# EAGLE board CRYSTALATOR (EAGLE 6.3)
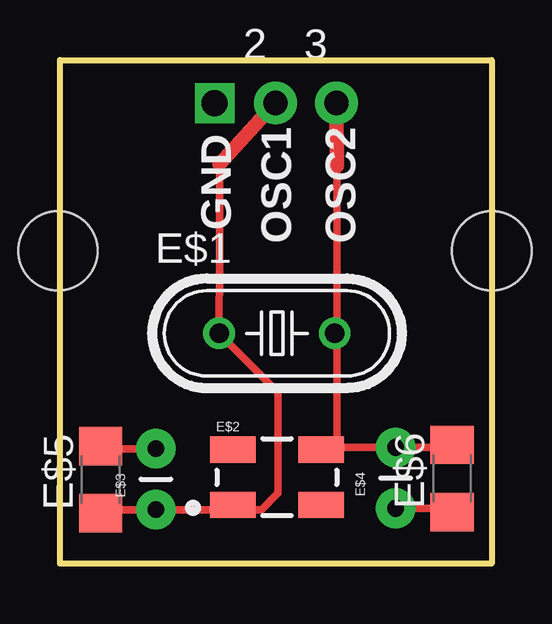
[diagram p0: board, top side]
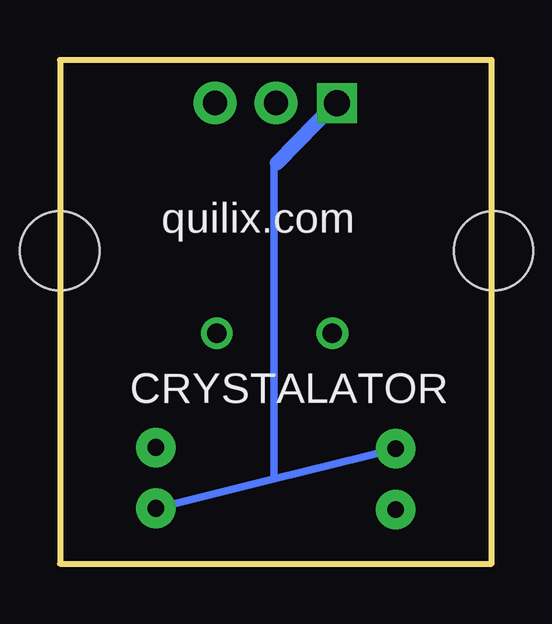
[diagram p1: board, bottom side, seen from below]

Size 18 x 21 mm. Coordinates in mm from the lower left corner, seen from the top.
Outline: 0,0 0,21 18,21 18,0 0,0
Copper layers (1*16): Top 0.035mm / dielectric 1.5mm / Bottom 0.035mm
Design rules "default": minimum track width 10mil, minimum drill 24mil, track to track 8mil, track to pad 8mil, pad to pad 8mil, via to via 8mil, smd to smd 8mil, copper to edge 40mil, drill to drill 8mil, minimum pad ring 10mil, minimum via ring 8mil, stop-mask expansion 4mil, vias tented up to drill 0mil, thermal gap 10mil

## Footprints (pad centres in the part's own frame; a part is rotated, then mirrored left to right if it is on the bottom)
1X01-CLEANBIG = drill 1.016 pad 1.778: 1 0,0
HC49U-V = drill 0.813: 1 -2.413,0; 2 2.413,0
CRYSTAL-OSC-SMD-5X3 = smd 1.9 x 1.1: 1 -1.85,-1.15; 2 1.85,-1.15; 3 1.85,1.15; 4 -1.85,1.15
CAP-PTH-SMALL = drill 0.7 pad 1.651: 1 0,0; 2 2.54,0
C1206 = smd 1.6 x 1.8: 1 -1.4,0; 2 1.4,0
STAND-OFF = hole 3.302: 0,0

## Placement (x,y rotation side)
2  [1X01-CLEANBIG]  8.99,19.21 0 top
3  [1X01-CLEANBIG]  11.53,19.21 0 top
E$1  [HC49U-V]  9.05,9.6 0 top
E$2  [CRYSTAL-OSC-SMD-5X3]  9.05,3.6 0 top
E$3  [CAP-PTH-SMALL]  4,2.25 90 top
E$4  [CAP-PTH-SMALL]  14,2.3 90 top
E$5  [C1206]  1.7,3.5 90 top
E$6  [C1206]  16.35,3.55 90 top
JP3  STAND-OFF  [STAND-OFF]  18.01,13.04 0 top
JP4  STAND-OFF  [STAND-OFF]  -0.09,13.04 0 top

## Library data of the parts
2 3 E$5 E$6 = adafruit
E$1-E$4 JP3 JP4 = SparkFun

## Nets
GND: E$3.2 E$4.1 E$5.2 E$6.1
OSC1: 2.1 E$1.1 E$2.1 E$3.1 E$5.1
OSC2: 3.1 E$1.2 E$2.3 E$4.2 E$6.2

## Tracks (layer width: path | path; a pad name or v marks a point on that pad's centre or on a via)
GND
  Top 0.305: E$4.1 16.35,2.3 E$6.1 | E$3.2 1.7,4.79 E$5.2
  Bottom 0.305: E$3.2 9.07,3.53 | 9.07,3.53 E$4.1 | 9.07,16.59 9.07,3.53
OSC1
  Top 0.305: 6.65,16.65 6.65,12.71 E$1.1 9.1,7.14 9.1,2.95 8.4,2.25 7.85,2.25 7.65,2.45 E$2.1 7.2,2.25 E$3.1 1.7,2.25 E$5.1
  Top 0.61: 2.1 6.65,16.65
OSC2
  Top 0.305: 11.55,16.6 11.55,9.69 E$1.2 11.55,9.49 11.55,4.75 E$2.3 10.99,4.84 E$4.2 16.35,4.84 E$6.2
  Top 0.61: 3.1 11.55,16.6
S$1  (via drill 1.1)
  other vias: 6.45,19.2
S$2
  Bottom 0.61: 6.5,19.21 8.95,16.7

## Text on the board
_tsilk: GND | OSC1 | OSC2
_bsilk: quilix.com | CRYSTALATOR